# Altium PCB ESP32S3.PcbDoc
Units mm, origin at the board's own origin, x right, y up, seen from the top; angles counter-clockwise.
Board outline 61.06 x 43.18 mm, 2 copper layers (Top Layer, Bottom Layer); 42 components, 47 nets, 219 pads, 112 vias.
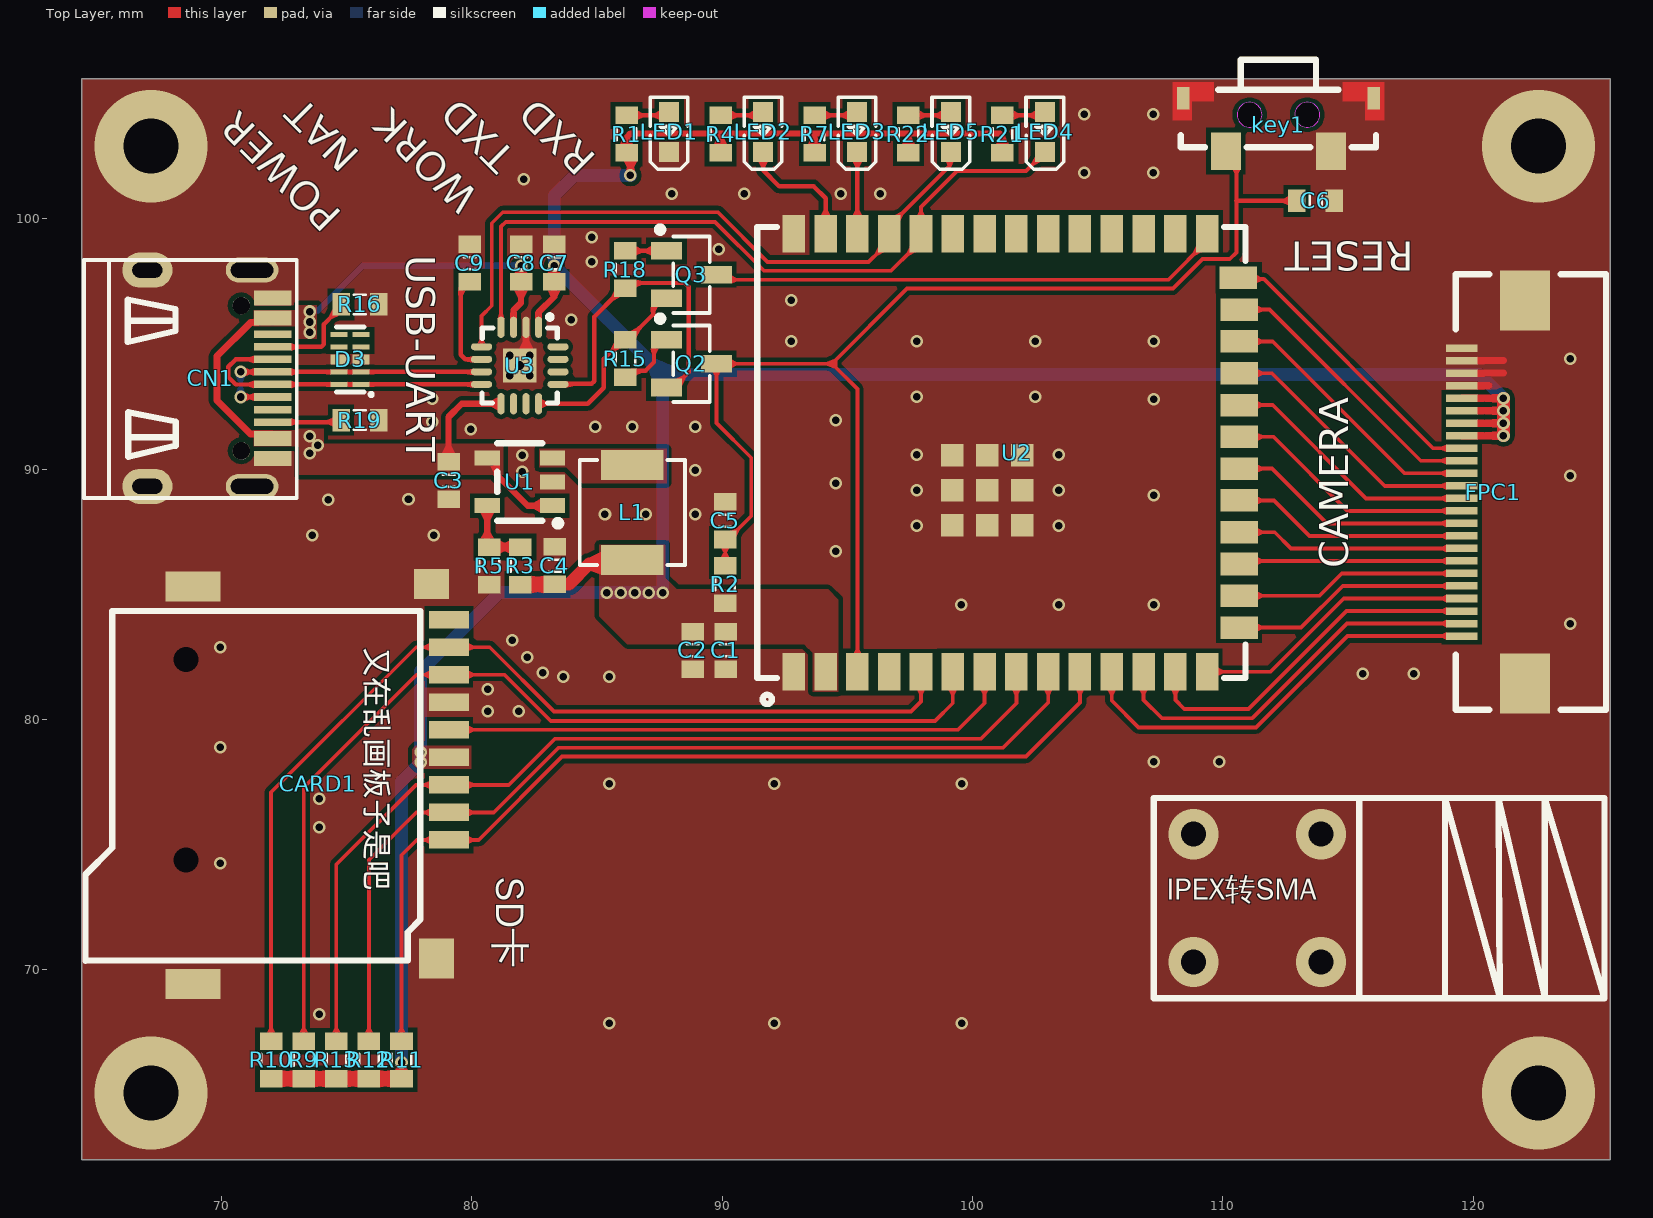
[diagram p0: Top Layer view]
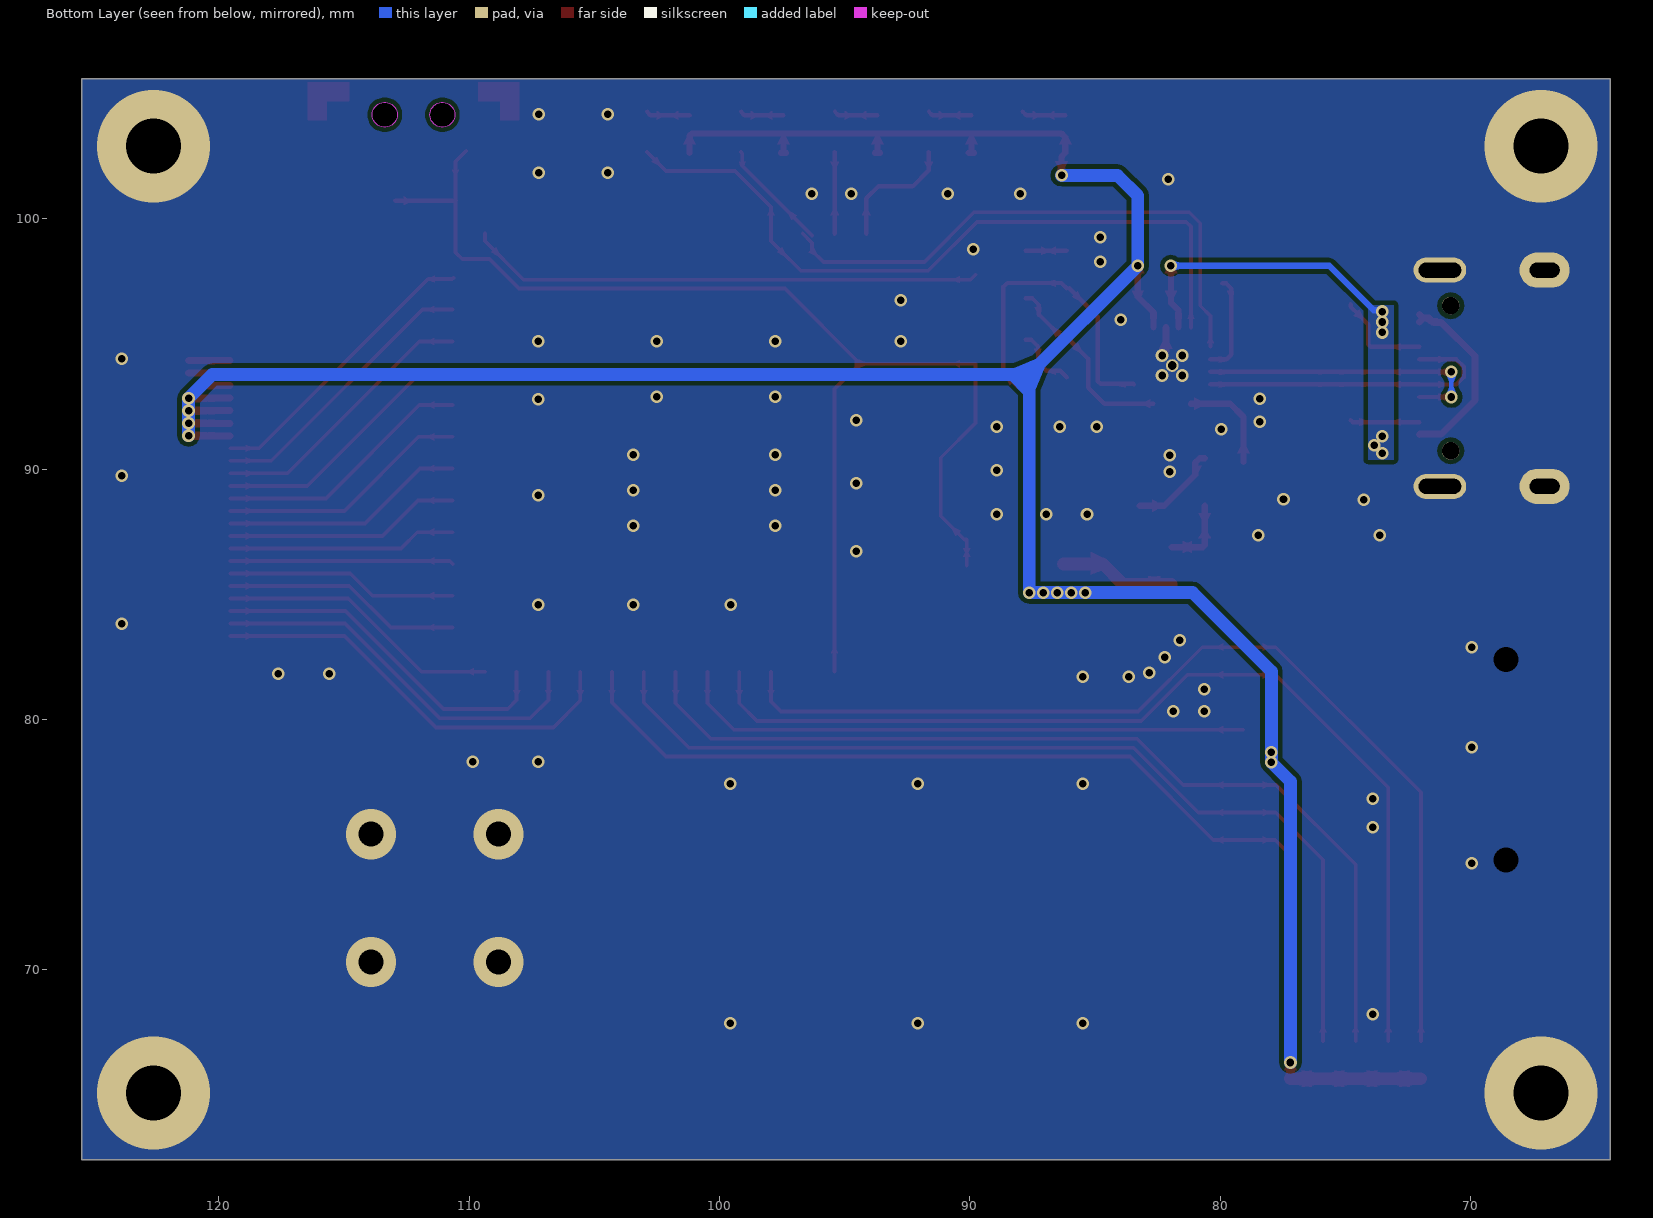
[diagram p1: Bottom Layer view, seen from below]
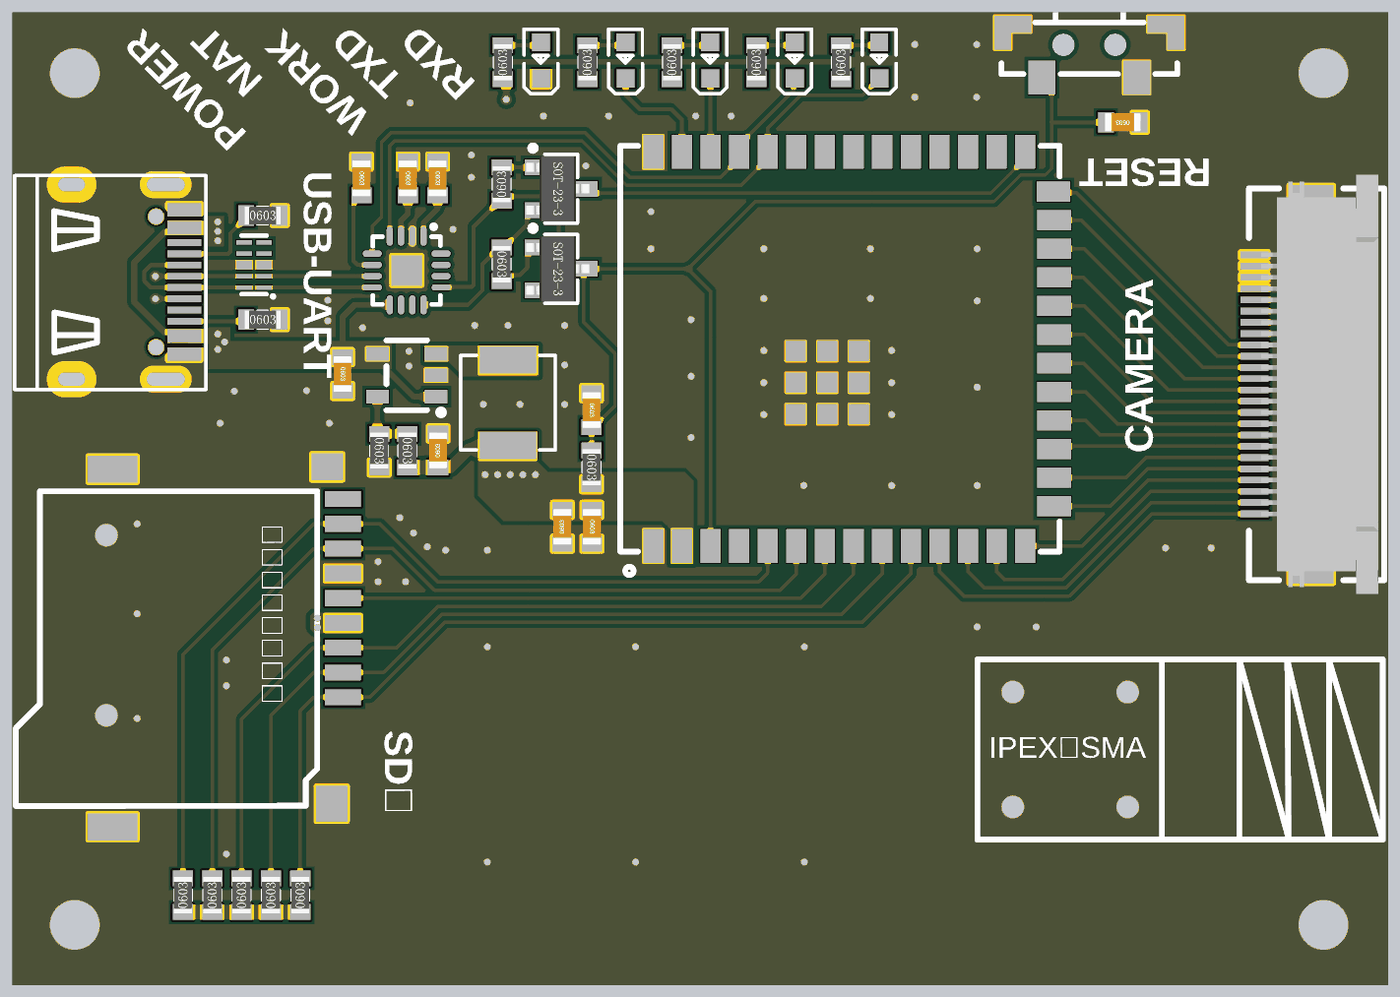
[diagram p2: 3D render of the assembled board from above, using the file's embedded part models]

## Layer stack, top to bottom
Top Solder: solder mask 0.0102, Solder Resist, Dk 3.5
Top Layer: signal copper 0.0356
Dielectric 1: dielectric 0.32, FR-4, Dk 4.8
Bottom Layer: signal copper 0.0356
Bottom Solder: solder mask 0.0102, Solder Resist, Dk 3.5

## Board outline
64.414,62.408 125.476,62.408 125.476,105.588 64.414,105.588

## Design rules (kind name [scope] priority, off if disabled: settings)
Clearance [All] p1: gap=0.178 ignorepadtopadclearanceinfootprint=TRUE except(0: Arc-Hole Track-Hole SMDPad-Hole THPad-Hole Via-Hole Fill-Hole Poly-Hole Region-Hole Text-Hole; 0.152: Arc-Via Track-Via; 0.203: Arc-Arc Arc-Track Track-Track)
PlaneConnect [All] p1: planeconnectstyle=Direct reliefexpansion=0.508 reliefentries=4 reliefconductorwidth=0.254 reliefairgap=0.254
PolygonConnect [All] p1: connectstyle=Direct reliefconductorwidth=0.254 reliefentries=4 polygonreliefangle="90 Angle" airgapwidth=0.254
RoomDefinition ESP32S3 [InComponentClass('ESP32S3')] p1: confinementstyle=ConfineOut formatcopy=TRUE lockcomponents=FALSE outline 133.325,71.45 177.648,71.45 177.648,94.564 133.325,94.564
RoutingVias [All] p1: holewidth=0.3 width=0.5 viastyle="Through Hole" minholewidth=0.3 minwidth=0.5 maxholewidth=22.555 maxwidth=25.375
SolderMaskExpansion [All] p1: expansion=0.102 istentingtop=FALSE
Width [All] p1: maxlimit=25.375 minlimit=0.152 preferedwidth=0.152
29 further rules are at their usual default settings.

## Components (designator, comment, footprint, x,y, rotation, side; value= is the part's Value field where it differs from the comment)
C1 "10uF" 0603-C 90.134,82.753 r180 top
C2 "100nF" 0603-C 88.824,82.753 r0 top
C3 "4.7uF" 0603-C 79.07,89.535 r180 top
C4 "10uF" 0603-C 83.312,86.143 r0 top
C5 "1uF" 0603-C 90.119,87.935 r180 top
C6 "100nF" 0603-C 113.702,100.711 r90 top
C7 "1uF" 0603-C 83.287,98.222 r180 top
C8 "1uF" 0603-C 81.966,98.222 r180 top
C9 "100nF" 0603-C 79.908,98.222 r180 top
CARD1 "TF卡座" TF 73.838,77.419 r180 top locked
CN1 "Type-c" "Type-c 16pin" 69.28,93.372 r270 top locked
D3 "ESD-USB" SLP2510P8 75.14,94.381 r90 top locked
FPC1 "FPC0.5-24P" FPC-SMD_P0.50-24P_XJ-FGS 120.802,89.078 r270 top
key1 "KEY" 轻触开关侧按3*6*3.5 112.217,103.886 r180 top
L1 "2.2uH" "电感 4.2X4.4" 86.411,88.265 r270 top
LED1 "LED" LED-0603 87.88,103.462 r90 top
LED2 "LED" LED-0603 91.634,103.462 r90 top
LED3 "LED" LED-0603 95.388,103.462 r90 top
LED4 "LED" LED-0603 102.895,103.462 r90 top
LED5 "LED" LED-0603 99.142,103.462 r90 top
Q2 "SS8050" SOT23-3M 88.621,94.209 r0 top
Q3 "SS8050" SOT23-3M 88.621,97.765 r0 top
R1 "4.7K" 0603-R 86.182,103.378 r180 top
R2 "10K" 0603-R 90.119,85.395 r0 top
R3 "100K" 0603-R 81.94,86.131 r0 top
R4 "4.7K" 0603-R 89.935,103.378 r180 top
R5 "22K" 0603-R 80.696,86.131 r0 top
R7 "4.7K" 0603-R 93.688,103.378 r180 top
R9 "4.7K" 0603-R 73.285,66.396 r180 top
R10 "4.7K" 0603-R 71.984,66.396 r180 top
R11 "4.7K" 0603-R 77.191,66.396 r180 top
R12 "4.7K" 0603-R 75.889,66.396 r180 top
R13 "4.7K" 0603-R 74.587,66.396 r180 top
R15 "10K" 0603-R 86.131,94.412 r0 top
R16 "5.1K" 0603-R 75.529,96.573 r90 top
R18 "10K" 0603-R 86.131,97.968 r180 top
R19 "5.1K" 0603-R 75.529,91.95 r90 top
R21 "4.7K" 0603-R 101.194,103.378 r180 top
R22 "4.7K" 0603-R 97.441,103.378 r180 top
U1 "M3406-ADJ" M3406-ADJ 81.915,89.484 r0 top
U2 "ESP32-S3-WROOM-1U-N8R8" WIRELM-SMD_ESP32-S3-WROOM-1U 101.756,90.651 r90 top locked
U3 "CH343P" QFN16_3X3 81.915,94.132 r180 top

## Footprints (in the part's own frame and the unit in brackets; to place one, negate y for a bottom-side part, rotate by r counter-clockwise, add the part's x,y. Pads: shape width x height; smd on the part's side, far side on the other; paste and mask are expansions set on the pad)
0603-C [mm]
  rect 0.9x0.7 smd: 1(0,0.75) 2(0,-0.75)
  silkscreen extent -0.24,-0.24 0.24,0.24, body extent -0.41,-0.8 0.41,0.8, height 0.84
0603-R [mm]
  rect 0.9x0.7 smd: 1(0,0.75) 2(0,-0.75)
  silkscreen extent -0.39,-0.24 0.39,0.24, body extent -0.4,-0.8 0.4,0.8, height 0.45
FPC-SMD_P0.50-24P_XJ-FGS [mm]
  rect 2.4x2 smd: 0(-7.65,1.262) 0(7.65,1.262)
  rect 0.3x1.25 smd: 1(-5.752,-1.262) 2(-5.25,-1.262) 3(-4.75,-1.262) 4(-4.25,-1.262) 5(-3.75,-1.262) 6(-3.25,-1.262) 7(-2.75,-1.262) 8(-2.25,-1.262) 9(-1.75,-1.262) 10(-1.25,-1.262) 11(-0.75,-1.262) 12(-0.25,-1.262) 13(0.25,-1.262) 14(0.75,-1.262) 15(1.25,-1.262) 16(1.75,-1.262) 17(2.25,-1.262) 18(2.75,-1.262) 19(3.25,-1.262) 20(3.75,-1.262) 21(4.25,-1.262) 22(4.75,-1.262) 23(5.25,-1.262) 24(5.75,-1.262)
  silkscreen extent -8.7,-1.5 8.7,4.5, body extent -9.3,-0.95 9.3,4.25, height 2
LED-0603 [mm]
  rect 0.8x0.8 smd: 1(-0.799,-0.003) 2(0.799,0.004)
  silkscreen extent -1.49,-0.75 1.39,0.76
M3406-ADJ [mm]
  rect 1x0.6 smd mask+0.051: 1(1.3,-0.95) 2(1.3,0) 3(1.3,0.95) 4(-1.3,0.95) 5(-1.3,-0.95)
  silkscreen extent -0.9,-1.78 1.65,1.55
QFN16_3X3 [mm]
  rect 1.35x1.35 smd paste+0 mask+0.102: 0(0,0)
  round 0.508 hole 0.356 mask+0.102: 0(0,0)
  oval 0.28x0.85 smd mask+0.051: 1(-0.75,-1.526) 2(-0.25,-1.526) 3(0.25,-1.526) 4(0.75,-1.526) 9(0.75,1.526) 10(0.25,1.526) 11(-0.25,1.526) 12(-0.75,1.526)
  oval 0.85x0.28 smd mask+0.051: 5(1.526,-0.75) 6(1.526,-0.25) 7(1.526,0.25) 8(1.526,0.75) 13(-1.526,0.75) 14(-1.526,0.25) 15(-1.526,-0.25) 16(-1.526,-0.75)
  silkscreen extent -1.5,-2.02 1.5,1.5, body extent -1.52,-1.52 1.52,1.52, height 0.25
SLP2510P8 [mm]
  rect 0.201x0.681 smd mask+0.051: 1(-1.001,-0.439) 2(-0.5,-0.439) 4(0.5,-0.439) 5(1.001,-0.439) 6(1.001,0.439) 7(0.5,0.439) 9(-0.5,0.439) 10(-1.001,0.439)
  rect 0.399x0.681 smd mask+0.051: 3(0,-0.439) 8(0,0.439)
  silkscreen extent -1.44,-0.88 1.3,0.55
SOT23-3M [mm] "SOT23, 3-Leads, Body 2.9x1.3mm, Pitch 0.95mm, Lead Span 2.4mm, IPC Low Density"
  rect 1.25x0.7 smd mask+0.051: 1(-0.847,0.948) 2(-0.847,-0.952) 3(1.153,-0.002)
  silkscreen extent -1.22,-1.53 0.88,1.92, body extent -1.4,-1.45 1.4,1.45, height 1.2
TF [mm]
  rect 1.6x0.7 smd: 1(-5.25,2.235) 2(-5.25,1.136) 3(-5.25,0.035) 4(-5.25,-1.065) 5(-5.25,-2.165) 6(-5.25,-3.265) 7(-5.25,-4.365) 8(-5.25,-5.465) 9(-5.25,-6.565)
  rect 1.4x1.6 smd: 6(-4.75,6.962)
  rect 1.4x1.2 smd: 6(-4.547,-7.989)
  rect 2.2x1.2 smd: 6(4.977,7.989) 6(4.977,-7.891)
  round 0.762 hole 1: 6(5.25,3.035) 6(5.25,-4.965)
  silkscreen extent -4.11,-6.91 9.27,7.07, body extent -5.98,-8.08 9.23,8.23, height 2
"Type-c 16pin" [mm]
  oval 1.4x2 hole 0.6 slot 1.2 at 90 deg: 0(-4.574,-2.239) 0(4.066,-2.239)
  oval 1x2.1 hole 0.6 slot 1.7 at 90 deg: 0(-4.574,1.941) 0(4.066,1.941)
  rect 0.3x1.5 smd: A1(-3.604,2.761) A4(-2.804,2.761) A5(-1.504,2.761) A6(-0.504,2.761) A7(-0.004,2.761) A8(0.996,2.761) A9(2.296,2.761) A12(3.096,2.761) B1(2.796,2.761) B4(1.996,2.761) B5(1.496,2.761) B6(0.496,2.761) B7(-1.004,2.761) B8(-2.004,2.761) B9(-2.504,2.761) B12(-3.304,2.761)
  round 0.7 hole 0.7: D(-3.154,1.511) D(2.646,1.511)
  silkscreen extent -4.97,-4.77 4.53,3.72
WIRELM-SMD_ESP32-S3-WROOM-1U [mm]
  rect 1.5x0.9 smd mask+0.05: 1(-8.75,8.895) 2(-8.75,7.625) 3(-8.75,6.355) 4(-8.75,5.085) 5(-8.75,3.815) 6(-8.75,2.545) 7(-8.75,1.275) 8(-8.75,0.005) 9(-8.75,-1.265) 10(-8.75,-2.535) 11(-8.75,-3.805) 12(-8.75,-5.075) 13(-8.75,-6.345) 14(-8.75,-7.615) 27(8.75,-7.615) 28(8.75,-6.345) 29(8.75,-5.075) 30(8.75,-3.805) 31(8.75,-2.535) 32(8.75,-1.265) 33(8.75,0.005) 34(8.75,1.275) 35(8.75,2.545) 36(8.75,3.815) 37(8.75,5.085) 38(8.75,6.355) 39(8.75,7.625) 40(8.75,8.895)
  rect 0.9x1.5 smd mask+0.05: 15(-6.985,-8.895) 16(-5.715,-8.895) 17(-4.445,-8.895) 18(-3.175,-8.895) 19(-1.905,-8.895) 20(-0.635,-8.895) 21(0.635,-8.895) 22(1.905,-8.895) 23(3.175,-8.895) 24(4.445,-8.895) 25(5.715,-8.895) 26(6.985,-8.865)
  rect 0.9x0.9 smd mask+0.051: 41(-2.9,-0.225) 41(-2.9,1.175) 41(-2.9,2.575) 41(-1.5,2.575) 41(-1.5,-0.225) 41(-1.5,1.175) 41(-0.1,2.575) 41(-0.1,1.175) 41(-0.1,-0.225)
  silkscreen extent -10.04,-9.14 9.02,10.36
"电感 4.2X4.4" [mm]
  rect 1.2x2.5 smd: 1(-1.9,0) 2(1.9,0)
  silkscreen extent -2.1,-2.1 2.1,2.1
轻触开关侧按3*6*3.5 [mm]
  rect 1.2x1.5 smd mask+0.051: 1(2.1,1.184) 2(-2.1,1.184)
  rect 0.5x0.9 smd: 3(-3.8,-0.916) 4(3.8,-0.916)
  Top Layer region: -4.226,-0.041 -3.464,-0.041 -3.464,-0.803 -2.575,-0.803 -2.575,-1.565 -4.226,-1.565 -4.226,-0.041
  Top Layer region: 4.226,-0.041 3.464,-0.041 3.464,-0.803 2.575,-0.803 2.575,-1.565 4.226,-1.565 4.226,-0.041
  Keep-Out Layer board cut-out: -0.65,-0.265 -0.7,-0.049 -0.838,0.125 -1.039,0.222 -1.261,0.222 -1.462,0.125 -1.601,-0.049 -1.65,-0.265 -1.65,-0.265 -1.601,-0.482 -1.462,-0.656 -1.261,-0.753 -1.039,-0.753 -0.838,-0.656 -0.7,-0.482 -0.65,-0.265
  Keep-Out Layer board cut-out: 1.65,-0.265 1.601,-0.049 1.462,0.125 1.261,0.222 1.039,0.222 0.838,0.125 0.7,-0.049 0.65,-0.265 0.65,-0.265 0.7,-0.482 0.838,-0.656 1.039,-0.753 1.261,-0.753 1.462,-0.656 1.601,-0.482 1.65,-0.265
  silkscreen extent -3.9,-2.47 3.9,1.03

## Part data
C1 C2 C3 C4 C5 C6 C7 C8 C9: library part C, "贴片电容", BOM名称=无极性贴片电容, 联系卖家，免费查找封装=唯一出售店铺网址https://shop463601444.taobao.com
CARD1: BOM_JLCPCB Part Class="Extended Part", BOM_Manufacturer=THD, BOM_Manufacturer Part=THD2528-11SD-GF, BOM_Supplier=LCSC, BOM_Supplier Part=C283232, Contributor=LCSC, spicePre=C, spiceSymbolName=THD2528-11SD-GF
CN1: "U262-161N-4BVC11"
D3: "RClamp0524PATCT", Breakdown Voltage (VBR)=6V, Clamping Voltage@Ipp=15V, JLCPCB Part Class="Extended Part", Junction Capacitance(Cj)@1MHz=0.8pF@1MHz, Manufacturer=SEMTECH, Operating Temperature=-55℃~+125℃@(Tj), Peak Pulse Power(Ppp)@8/20us=150W, Reverse Stand-Off Voltage (Vrwm)=5V, Add into BOM=yes, Convert to PCB=yes, Datasheet=https://atta.szlcsc.com/upload/public/pdf/source/20150124/1457707260739.pdf, Device=RClamp0524PATCT_C40960, LCSC Part Name=RClamp0524PATCT, Manufacturer Part=RClamp0524PATCT, Name=RClamp0524PATCT, Supplier=LCSC, Supplier Footprint=SLP2510P8, Supplier Part=C40960, Symbol=RClamp0524PATCT
FPC1: BOM_JLCPCB Part Class="Extended Part", BOM_Manufacturer="Shenzhen Cankemeng", BOM_Manufacturer Part=-, BOM_Supplier=LCSC, BOM_Supplier Part=C132514, Contributor=LCSC, spicePre=F, spiceSymbolName=FPC0.5-24P
key1: library part 轻触开关3*6*3.6
L1: library part L, "L", BOM_JLCPCB Part Class="Extended Part", BOM_Manufacturer=Sunlord, BOM_Manufacturer Part=UPZ2012D800-4R0TF, BOM_Supplier=LCSC, BOM_Supplier Part=C145060, Contributor=LCSC, nameAlias=Value, spicePre=L, spiceSymbolName=UPZ2012D800-4R0TF
LED1 LED2 LED3 LED4 LED5: BOM_JLCPCB Part Class="Extended Part", BOM_Manufacturer="Wuxi ARK Tech Elec", BOM_Manufacturer Part=D-G060306G1-KS2, BOM_Supplier=LCSC, BOM_Supplier Part=C118334, Contributor=LCSC, spicePre=L, spiceSymbolName=D-G060306G1-KS2
R1 R2 R3 R4 R5 R7 R9 R10 R11 R12 R13 R15 R16 R18 R19 R21 R22: library part R, "贴片电阻", BOM名称=贴片电阻, 联系卖家，免费查找封装=唯一出售店铺网址https://shop463601444.taobao.com
U1: Input Voltage=-, JLCPCB Part Class="Extended Part", LCSC Part Name=降压型, Manufacturer=西安航天民芯, Add into BOM=yes, Convert to PCB=yes, Datasheet=https://atta.szlcsc.com/upload/public/pdf/source/20161110/1478742836232.pdf, Device=M3406-ADJ, Function=降压型, Manufacturer Part=M3406-ADJ, Name=M3406-ADJ, Number of Outputs=-, Output Current (Max)=-, Supplier=LCSC, Supplier Footprint=SOT-23-5, Supplier Part=C83224, Switching Frequency=-, Symbol=M3406, Synchronous Rectification=-, Topology=-
U2: JLCPCB Part Class="Extended Part", LCSC Part Name=ESP32-S3-WROOM-1U-N8, Manufacturer=ESPRESSIF(乐鑫), Add into BOM=yes, Convert to PCB=yes, Datasheet=https://atta.szlcsc.com/upload/public/pdf/source/20220628/A2AC12B3C87735CAEB7EBE2DBE80936C.pdf, Device=ESP32-S3-WROOM-1U-N8, Manufacturer Part=ESP32-S3-WROOM-1U-N8, Name=ESP32-S3-WROOM-1U-N8, Supplier=LCSC, Supplier Footprint=SMD, Supplier Part=C2980297, Symbol=ESP32-S3-WROOM-1U-N8
U3: "USB to high speed enhanced TTL Serial / UART"

## Via types
v1: diameter 0.5, hole 0.3, Top Layer to Bottom Layer, tented both sides, 100 vias
v2: diameter 2, hole 1, Top Layer to Bottom Layer, tented bottom, 4 vias
v3: diameter 4.5, hole 2.2, Top Layer to Bottom Layer, tented bottom, 4 vias
v4: diameter 0.508, hole 0.305, Top Layer to Bottom Layer, tented both sides, 4 vias

## Nets (pads, with @x,y where several pads share a name; then routed paths per layer and width w, separated by ;. In a path a pad name is that pad's centre, name@x,y a point inside that pad or via, vN(x,y) a via of type N, cw(c..) or ccw(c..) an arc to the next point about the centre after c; other vN are vias at no path point)
CHIP_PU: C5.1 C6.1 key1.1 Q2.3 R2.1 U2.3 | length 51.1
  Top Layer w0.152: R2.1 C5.1 90.219,87.185 91.161,88.126 91.161,90.45 89.774,91.837 Q2.3 94.389,94.206 ; U2.3 95.401,93.194 94.389,94.206 ; key1.1 110.541,102.278 110.541,100.711 110.541,98.654 110.272,98.384 109.179,98.384 108.001,97.206 97.388,97.206 94.389,94.206
  Top Layer w0.178: 110.541,100.711 C6.1
DTR: Q3.2 R15.1 U3.12 | length 7.8
  Top Layer w0.178: U3.12 84.631,92.606 85.268,93.243 85.268,94.398 86.031,95.162 86.231,95.162 87.237,96.168 87.237,96.551 87.499,96.812 Q3.2
GND: C1.1 C2.2 C3.1 C4.1 C5.2 C6.2 C7.2 C8.2 C9.2 CARD1.6 CN1.0 CN1.A1 CN1.A12 CN1.B1 CN1.B12 D3.3 D3.8 FPC1.0 FPC1.1 FPC1.2 FPC1.3 FPC1.4 key1.2 key1.3 key1.4 LED1.1 R5.2 R16.2 R19.2 U1.2 U2.1 U2.40 U2.41 U3.0 U3.2 | length 5.6
  Top Layer w0.178: U3.0@82.165,94.687 v4(82.32,94.532)
  Top Layer w0.279: U3.0@82.165,94.687 U3.2 ; FPC1.4 120.625,93.328 ; FPC1.3 121.208,93.828 ; FPC1.2 121.208,94.328
  other v1: 85.496,67.869 92.075,67.869 99.568,67.869 73.914,68.224 69.952,74.244 73.914,75.692 73.914,76.835 85.496,77.419 92.075,77.419 99.568,77.419 107.239,78.308 109.855,78.308 69.952,78.892 80.645,80.315 81.864,80.315 80.645,81.204 83.642,81.712 85.496,81.712 115.595,81.813 117.627,81.813 82.829,81.864 82.22,82.474 69.952,82.88 81.61,83.16 123.876,83.82 99.543,84.582 103.441,84.582 107.239,84.582 94.539,86.716 73.635,87.351 78.486,87.351 97.765,87.732 103.441,87.732 85.319,88.189 86.944,88.189 88.925,88.189 74.27,88.773 77.47,88.798 107.239,88.951 97.765,89.154 103.441,89.154 94.539,89.433 123.876,89.738 82.017,89.891 88.925,89.941 82.017,90.551 97.765,90.576 103.441,90.576 79.959,91.592 84.938,91.694 86.411,91.694 88.925,91.694 78.41,91.897 94.539,91.948 107.239,92.786 78.41,92.812 97.765,92.888 102.502,92.888 123.876,94.412 92.761,95.098 97.765,95.098 102.502,95.098 107.239,95.098 83.972,95.961 92.761,96.749 84.785,98.273 89.865,98.781 84.785,99.263 87.986,100.99 90.881,100.99 94.742,100.99 96.317,100.99 82.067,101.575 104.47,101.829 107.213,101.829 104.47,104.165 107.213,104.165
  other v2: 108.819,70.313 113.919,70.313 108.819,75.413 113.919,75.413
  other v3: 67.183,65.075 122.606,65.075 67.183,102.895 122.606,102.895
  other v4: 81.51,93.733 82.32,93.733 81.51,94.532
GPIO0: Q3.3 U2.27 | length 20.6
  Top Layer w0.152: Q3.3 89.975,97.561 107.831,97.561 109.371,99.101 U2.27
LED1: LED2.1 U2.39 | length 5.1
  Top Layer w0.178: LED2.1 91.638,101.931 92.273,101.295 93.65,101.295 94.131,100.814 U2.39
LED2: LED3.1 U2.38 | length 3.3
  Top Layer w0.178: LED3.1 95.401,102.653 U2.38
NetC9_1: C9.1 U3.6 | length 4
  Top Layer w0.178: C9.1@79.908,97.421 79.763,97.421 79.553,97.211 79.553,94.564 79.735,94.382 U3.6
NetCN1_A5: CN1.A5 R16.1 | length 4
  Top Layer w0.178: CN1.A5 73.989,94.876 74.093,94.981 74.093,95.788 74.517,96.212 74.779,96.473 R16.1
NetCN1_B5: CN1.B5 R19.1 | length 2.8
  Top Layer w0.178: CN1.B5 74.705,91.876 R19.1
NetL1_1: L1.1 U1.3
NetLED1_2: LED1.2 R1.2 | length 1.7
  Top Layer w0.178: R1.2 87.743,104.128 LED1.2
NetLED2_2: LED2.2 R4.2 | length 1.8
  Top Layer w0.178: R4.2 91.497,104.128 LED2.2
NetLED3_2: LED3.2 R7.2 | length 1.8
  Top Layer w0.178: R7.2 95.251,104.128 LED3.2
NetLED4_2: LED4.2 R21.2 | length 1.8
  Top Layer w0.178: R21.2 102.758,104.128 LED4.2
NetLED5_2: LED5.2 R22.2 | length 1.8
  Top Layer w0.178: R22.2 99.005,104.128 LED5.2
NetQ2_1: Q2.1 R15.2 | length 2.6
  Top Layer w0.178: R15.2 86.393,93.923 86.938,93.923 87.275,94.26 87.275,94.895 87.536,95.156 Q2.1
NetQ3_1: Q3.1 R18.2 | length 1.6
  Top Layer w0.178: R18.2 86.137,98.712 Q3.1
NetR3_1: R3.1 R5.1 U1.5 | length 2.9
  Top Layer w0.254: U1.5 80.615,86.962 R5.1 R3.1
OV_D0: FPC1.22 U2.13 | length 14.3
  Top Layer w0.152: U2.13 108.101,80.774 108.458,80.416 111.023,80.416 114.934,84.328 FPC1.22
OV_D1: FPC1.21 U2.14 | length 11.4
  Top Layer w0.152: U2.14 111.898,81.901 114.825,84.828 FPC1.21
OV_D2: FPC1.20 U2.15 | length 9.6
  Top Layer w0.152: U2.15 113.125,83.666 114.786,85.328 FPC1.20
OV_D3: FPC1.19 U2.16 | length 9.3
  Top Layer w0.152: U2.16 113.856,84.936 114.748,85.828 FPC1.19
OV_D4: FPC1.18 U2.17 | length 8.9
  Top Layer w0.152: U2.17 110.772,86.328 FPC1.18
OV_D5: FPC1.17 U2.18 | length 9.2
  Top Layer w0.152: U2.18 112.07,87.476 112.718,86.828 FPC1.17
OV_D6: FPC1.16 U2.19 | length 9.5
  Top Layer w0.152: U2.19 112.041,88.746 113.459,87.328 FPC1.16
OV_D7: FPC1.15 U2.20 | length 9.8
  Top Layer w0.152: U2.20 111.965,90.016 114.153,87.828 FPC1.15
OV_HREF: FPC1.12 U2.23 | length 10.8
  Top Layer w0.152: U2.23 111.965,93.826 116.463,89.328 FPC1.12
OV_PCLK: FPC1.13 U2.22 | length 10.4
  Top Layer w0.152: U2.22 111.99,92.556 115.718,88.828 FPC1.13
OV_PWDN: FPC1.9 U2.26 | length 11.7
  Top Layer w0.152: U2.26 110.672,97.585 111.635,97.585 118.392,90.828 FPC1.9
OV_RESET: FPC1.10 U2.25 | length 11.4
  Top Layer w0.152: U2.25 111.863,96.366 117.901,90.328 FPC1.10
OV_SCL: FPC1.23 U2.12 | length 15.7
  Top Layer w0.152: U2.12 106.831,80.774 107.556,80.048 111.176,80.048 114.955,83.828 FPC1.23
OV_SDA: FPC1.24 U2.11 | length 17.1
  Top Layer w0.152: U2.11 105.561,80.748 106.629,79.68 111.328,79.68 114.976,83.328 FPC1.24
OV_VSYNC: FPC1.14 U2.21 | length 10.1
  Top Layer w0.152: U2.21 112.016,91.286 114.974,88.328 FPC1.14
OV_XCLK: FPC1.11 U2.24 | length 11.1
  Top Layer w0.152: U2.24 111.99,95.096 117.258,89.828 FPC1.11
RTS: Q2.2 R18.1 U3.13 | length 12.9
  Top Layer w0.178: U3.13 83.461,93.402 84.783,93.402 84.887,93.506 84.887,96.073 85.77,96.957 R18.1@86.031,97.218 ; R18.1 86.343,97.429 88.509,97.429 88.665,97.273 88.665,93.873 88.049,93.256 Q2.2
TF_CLK: CARD1.5 U2.7 | length 23.1
  Top Layer w0.152: CARD1.5 99.421,79.584 100.481,80.643 U2.7
TF_CMD: CARD1.3 R13.2 U2.8 | length 38.1
  Top Layer w0.152: R13.2 74.587,74.206 77.765,77.384 CARD1.3 81.473,77.384 83.312,79.223 100.33,79.223 101.751,80.643 U2.8
TF_DATA0: CARD1.7 R9.2 U2.6 | length 40.2
  Top Layer w0.152: R9.2 73.285,77.273 77.796,81.784 CARD1.7 81.31,81.784 83.154,79.939 98.507,79.939 99.211,80.643 U2.6
TF_DATA1: CARD1.8 R10.2 U2.5 | length 40.7
  Top Layer w0.152: R10.2 71.984,77.089 77.778,82.884 CARD1.8 80.713,82.884 83.281,80.315 97.536,80.315 97.941,80.72 U2.5
TF_DATA2: CARD1.1 R11.2 U2.10 | length 38.3
  Top Layer w0.152: R11.2 77.191,74.574 77.8,75.184 CARD1.1 80.279,75.184 83.607,78.511 102.133,78.511 104.291,80.669 U2.10
TF_DATA3: CARD1.2 R12.2 U2.9 | length 38.2
  Top Layer w0.152: R12.2 75.889,74.39 77.782,76.284 CARD1.2 79.538,76.284 80.876,76.284 83.459,78.867 101.219,78.867 103.021,80.669 U2.9
U0RXD: LED4.1 U2.36 U3.4 | length 29.4
  Top Layer w0.152: U3.4 81.165,99.682 81.356,99.873 89.713,99.873 91.669,97.917 96.749,97.917 97.559,98.727 97.567,98.727 97.941,99.101 97.941,100.468 99.377,101.905 102.141,101.905 LED4.1
U0TXD: LED5.1 U2.37 U3.5 | length 27.1
  Top Layer w0.152: U3.5 80.389,96.111 80.797,96.52 80.797,99.817 81.234,100.254 89.835,100.254 91.816,98.273 95.85,98.273 96.297,98.72 96.297,99.027 U2.37 ; U2.37@96.297,99.327 99.093,102.123 99.093,102.61 LED5.1
USB0_D+: CN1.A6 CN1.B6 D3.2 D3.9 U3.7 | length 12.5
  Top Layer w0.178: v1(70.762,92.876) CN1.B6 ; v1(70.762,93.876) 72.363,93.876 CN1.A6@72.365,93.878 ; CN1.A6 72.044,93.878 CN1.A6@72.365,93.878 ; D3.9 D3.9@74.93,93.88 ; U3.7 80.388,93.881 D3.2 D3.2 D3.9@74.93,93.88 ; CN1.A6@72.365,93.878 74.928,93.878 D3.9@74.93,93.88
  Bottom Layer w0.178: v1(70.762,92.876) v1(70.762,93.876)
USB0_D-: CN1.A7 CN1.B7 D3.1 D3.10 U3.8 | length 12.5
  Top Layer w0.178: CN1.B7 70.567,94.376 70.27,94.08 70.27,93.673 70.567,93.376 CN1.A7 72.043,93.378 74.699,93.378 D3.10 D3.10 80.388,93.381 U3.8
VCC-3.3V: C1.2 C2.1 C4.2 C7.1 CARD1.4 FPC1.5 FPC1.6 FPC1.7 FPC1.8 L1.2 R1.1 R2.2 R3.2 R4.1 R7.1 R9.1 R10.1 R11.1 R12.1 R13.1 R21.1 R22.1 U2.2 U3.1 | length 125.1
  Top Layer w0.254: R11.1 v1(77.191,66.294) ; U3.1 82.665,96.262 83.287,96.883 C7.1 v1(83.287,98.12) ; v1(86.335,101.727) 86.335,102.475 R1.1 86.182,103.251 86.335,103.403 89.941,103.403 ; R4.1@89.835,102.628 R4.1 ; R4.1@90.035,102.628 R4.1 ; R7.1@93.588,102.628 R7.1 ; R7.1@93.788,102.628 R7.1 ; R22.1@97.341,102.628 R22.1 ; R22.1@97.541,102.628 R22.1 ; R21.1 101.194,103.299 101.089,103.403 97.382,103.403 ; R4.1 89.935,103.397 89.941,103.403 ; 89.941,103.403 93.675,103.403 ; 93.675,103.403 97.382,103.403 ; 93.675,103.403 93.688,103.391 R7.1 ; 97.382,103.403 97.441,103.345 R22.1
  Top Layer w0.279: FPC1.8 v1(121.208,91.328) ; FPC1.7 v1(121.208,91.828) ; FPC1.6 v1(121.208,92.328) ; FPC1.5 v1(121.208,92.828)
  Top Layer w0.508: R10.1 R11.1 ; R3.2@81.952,85.393 C4.2 83.869,85.393 84.685,86.209 L1.2@86.255,86.209 ; v1(121.208,91.328) v1(121.208,91.828) v1(121.208,92.328) v1(121.208,92.828)
  Bottom Layer w0.508: v1(77.191,66.294) 77.191,77.521 v1(77.953,78.283) v1(77.953,78.689) 77.953,81.915 81.102,85.065 v1(85.395,85.065) v1(85.954,85.065) v1(86.512,85.065) v1(87.071,85.065) v1(87.63,85.065) 87.63,93.777 ; v1(86.335,101.727) 84.099,101.727 83.287,100.914 v1(83.287,98.12) 87.63,93.777 ; v1(121.208,91.328) v1(121.208,91.828) v1(121.208,92.328) v1(121.208,92.828) 120.259,93.777 87.63,93.777
VCC-5V#1: C3.2 C8.1 CN1.A4 CN1.A9 CN1.B4 CN1.B9 U1.1 U1.4 U3.3 U3.9 | length 27.2
  Top Layer w0.254: C3.2 79.07,92.075 79.601,92.606 U3.9 ; U1.4 80.815,90.434 80.988,90.261 80.988,89.776 82.23,88.534 U1.1 ; U3.3 81.663,95.661 81.663,96.344 81.966,96.647 C8.1 v1(81.966,98.12)
  Top Layer w0.279: CN1.B4 72.019,91.399 71.161,91.399 69.825,92.735 69.825,94.508 71.16,95.844 71.46,95.844 71.653,96.037 71.881,96.037 CN1.A4@71.892,96.026 ; CN1.B9 CN1.A4@71.892,96.026 ; CN1.A4 CN1.A4@71.892,96.026
  Bottom Layer w0.254: v1(73.533,96.291) 73.58,96.338 73.859,96.338 75.641,98.12 v1(81.966,98.12)
  other v1: 73.533,90.627 73.838,90.957 73.533,91.313 73.533,95.453 73.533,95.872
pads on no net: CARD1.9 CN1.A8 CN1.B8 CN1.D D3.4 D3.5 D3.6 D3.7 U2.4 U2.28 U2.29 U2.30 U2.31 U2.32 U2.33 U2.34 U2.35 U3.10 U3.11 U3.14 U3.15 U3.16

## Polygon pours and split planes (outlines as drawn)
GND on Top Layer "GND_L01_P033" (solid, remove dead copper, pour order 33): 64.414,62.408 125.476,62.408 125.476,105.588 64.414,105.588
VCC-5V#1 on Top Layer "VCC-5V#1_L01_P004" (solid, pour order 4): 73.113,91.62 74.092,91.62 74.092,90.38 73.113,90.38
VCC-5V#1 on Top Layer "VCC-5V#1_L01_P005" (solid, pour order 5): 73.076,96.545 73.812,96.545 73.812,95.201 73.076,95.201
NetL1_1 on Top Layer "NETL1_1_L01_P011" (solid, pour order 11): 82.702,90.805 87.782,90.805 87.782,89.433 84.404,89.433 83.769,90.068 82.702,90.068
VCC-3.3V on Top Layer "VCC-3.3V_L01_P029" (solid, pour order 29): 79.985,78.943 77.749,78.943 77.622,78.816 77.622,78.232 77.826,78.029 79.985,78.029
VCC-3.3V on Top Layer "VCC-3.3V_L01_P028" (solid, remove dead copper, pour order 28): 87.732,86.97 87.732,85.649 88.189,85.192 94.234,85.192 94.64,84.785 94.64,81.102 93.624,81.102 93.624,82.652 93.269,83.007 86.208,83.007 85.09,84.125 85.09,86.97
VCC-5V#1 on Top Layer "VCC-5V#1_L01_P027" (solid, pour order 27): 81.255,91 81.255,89.764 73.101,89.764 73.101,91 73.113,91
VCC-5V#1 on Top Layer "VCC-5V#1_L01_P018" (solid, remove dead copper, pour order 18): 71.298,91.593 73.812,91.593 73.812,90.882 71.298,90.882
VCC-5V#1 on Top Layer "VCC-5V#1_L01_P017" (solid, remove dead copper, pour order 17): 71.298,96.393 73.812,96.393 73.812,95.682 71.298,95.682
GND on Bottom Layer "GND_L02_P034" (solid, remove dead copper, pour order 34): 64.414,62.408 125.476,62.408 125.476,105.588 64.414,105.588
VCC-5V#1 on Bottom Layer "VCC-5V#1_L02_P019" (solid, pour order 19): 74.092,96.545 73.076,96.545 73.076,90.373 74.092,90.373

## Silkscreen, mask and mechanical layers (free items; w line width, h text height)
Top Overlay:
  lines w0.254: 115.443,68.86 115.443,76.86 ; 118.872,68.86 118.872,76.86 121.056,68.936 121.006,76.835 122.86,68.859 122.86,76.81 125.244,68.86 ; 125.244,68.86 125.244,76.86 107.244,76.86 107.244,68.86 125.244,68.86
  text "NAT" at 75.862,102.869 h2 r135
  text "TXD" at 82.09,102.839 h2 r135
  text "RXD" at 85.303,102.725 h2 r135
  text "WORK" at 80.609,101.221 h2 r135
  text "POWER" at 75.134,100.473 h2 r135
  text "RESET" at 117.632,99.472 h2 r180
  text "USB-UART" at 76.982,98.546 h2 r270
  text "CAMERA" at 115.399,86.034 h2 r90
  text "又在乱画板子是吧" at 75.48,82.907 h1.52 r270
  text "SD卡" at 80.573,73.716 h2 r270
  text "IPEX转SMA" at 107.754,72.497 h1.52
Mechanical 1:
  lines w0.127: 64.414,62.408 64.414,87.274 64.414,105.588 125.476,105.588 125.476,62.408 64.414,62.408